# EAGLE board chaves (EAGLE 7.2.0)
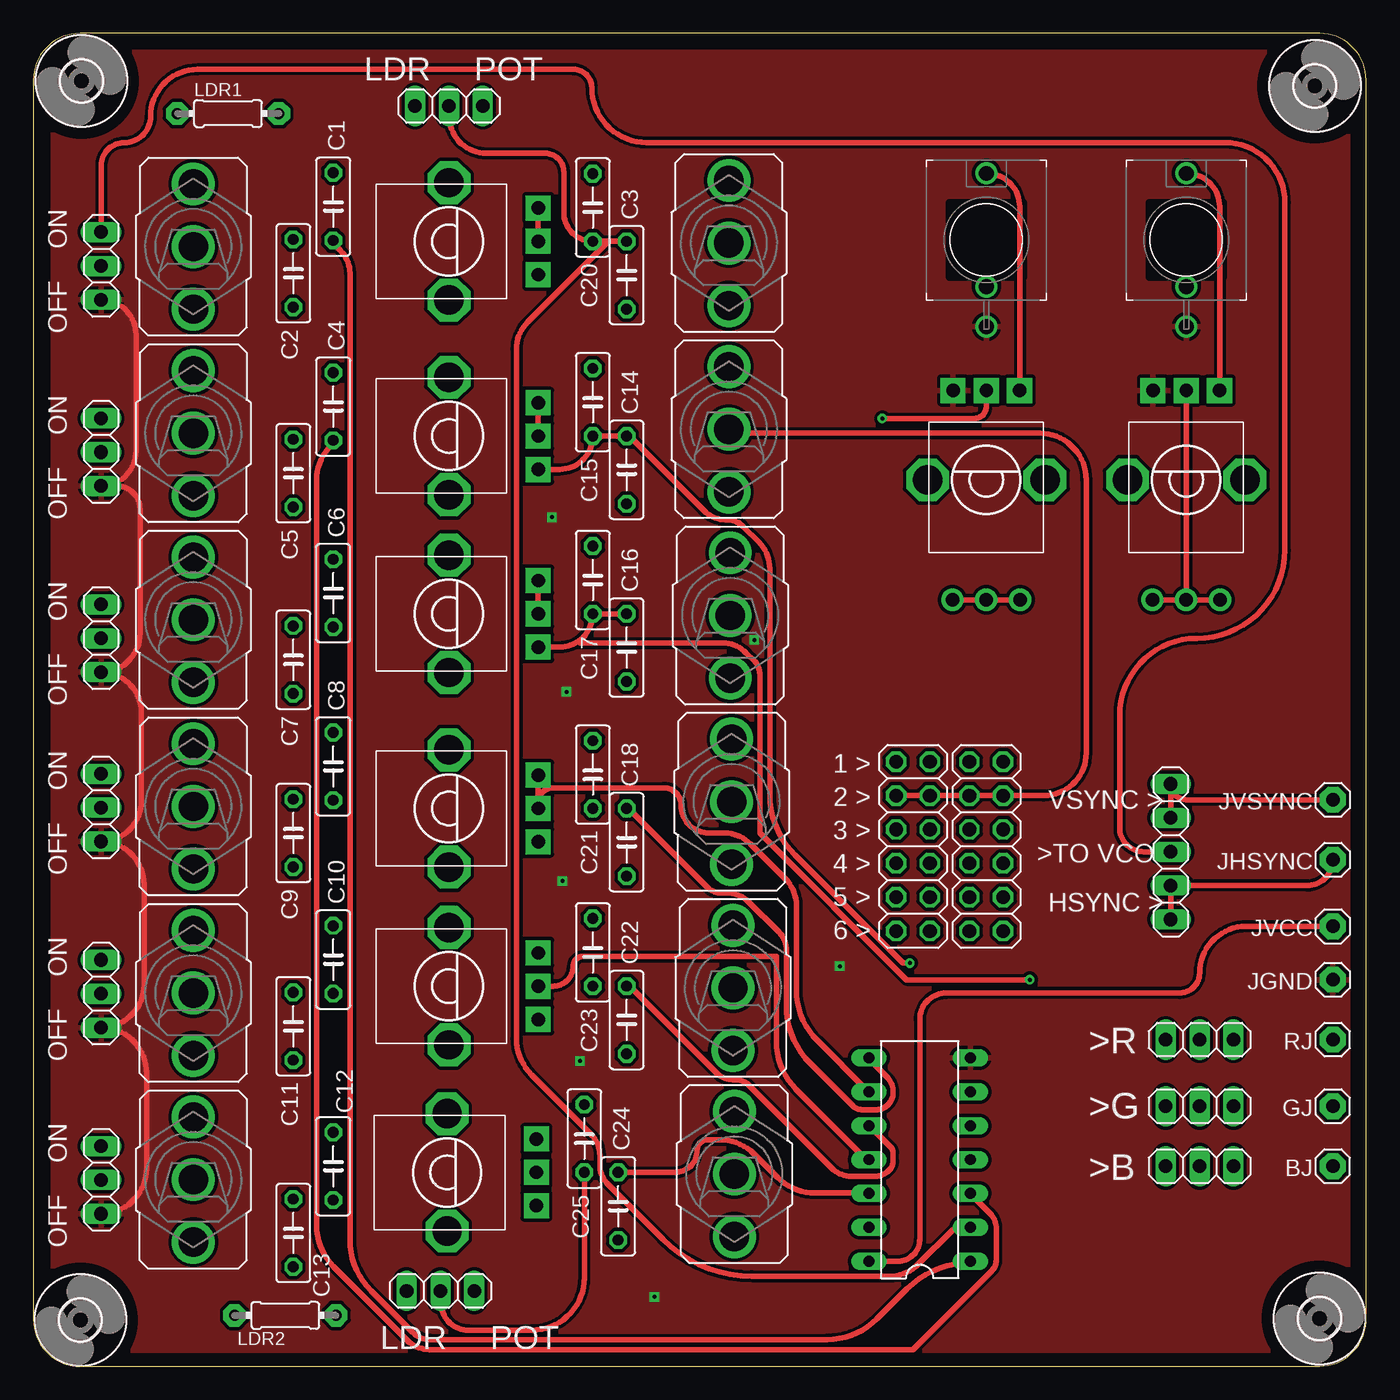
[diagram p0: board, top side]
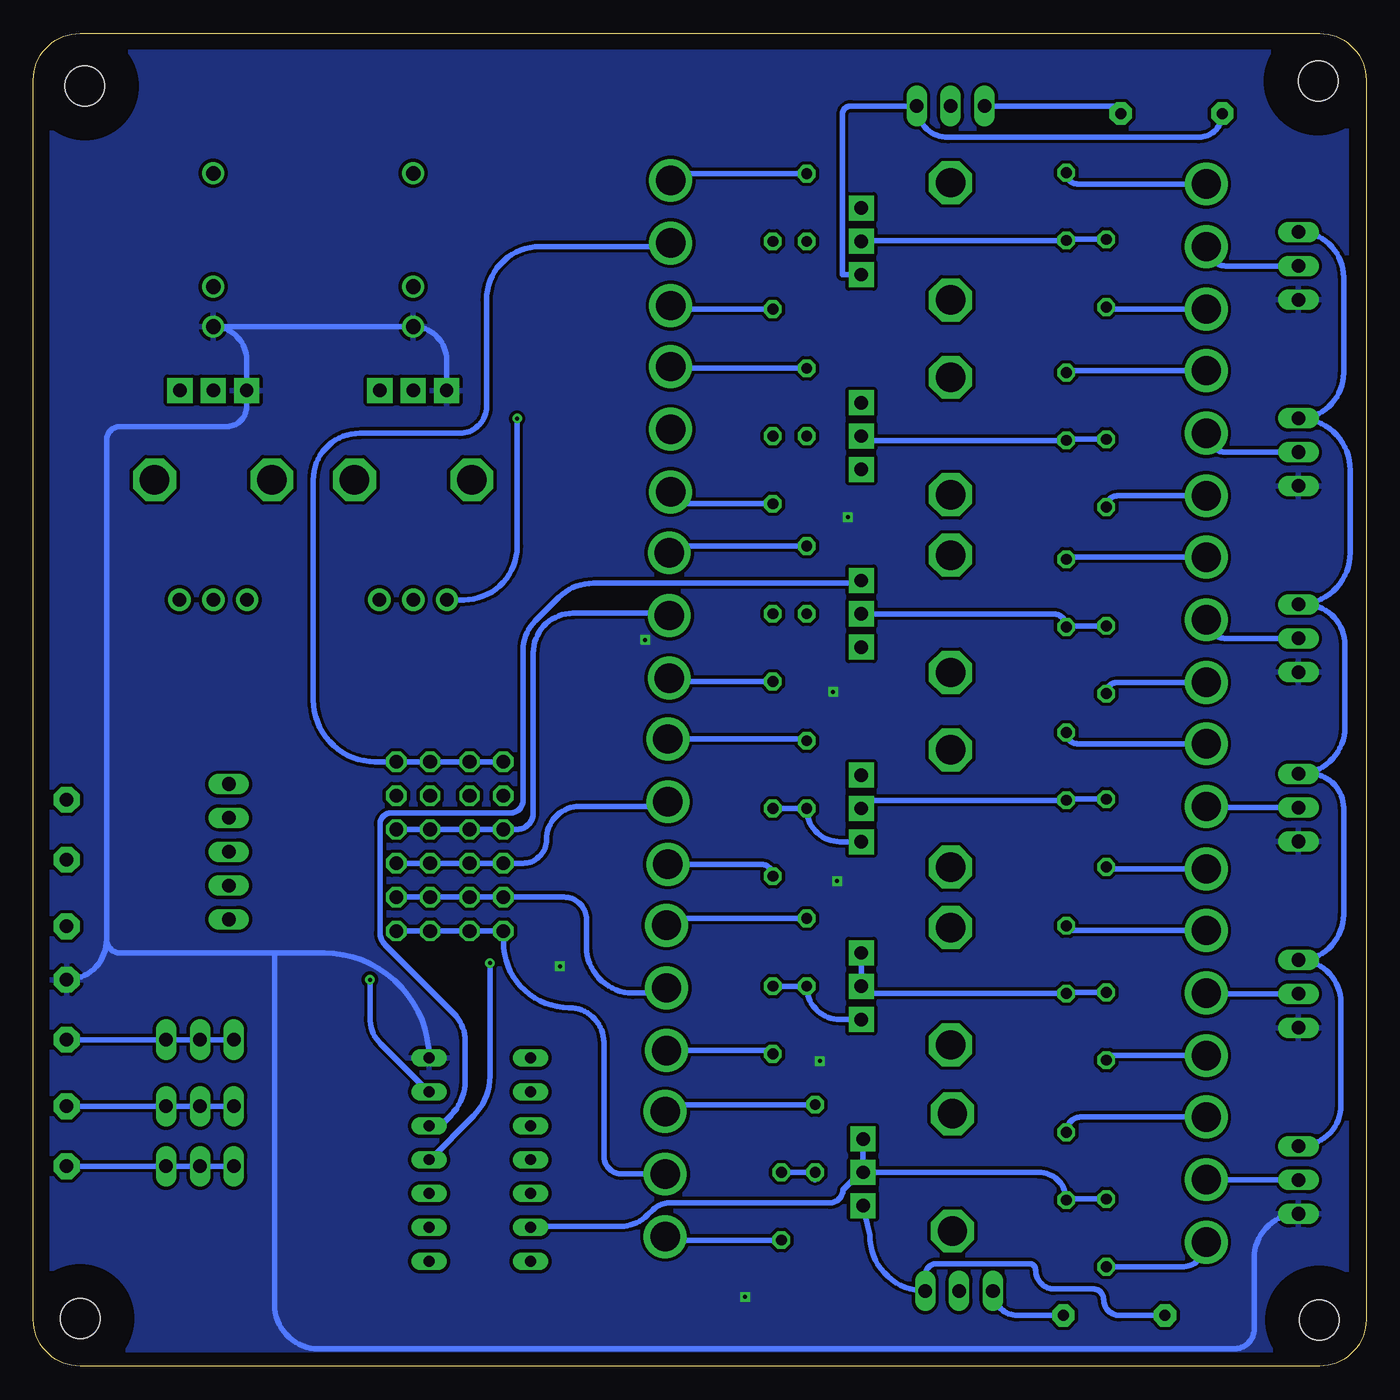
[diagram p1: board, bottom side, seen from below]

Size 100 x 100 mm. Coordinates in mm from the lower left corner, seen from the top.
Outline: 0,96.5 0,3.5 arc90 3.5,0 96.5,0 arc90 100,3.5 100,96.5 arc90 96.5,100 3.5,100 arc90 0,96.5
Copper layers (1*16): Top 0.035mm / dielectric 1.5mm / Bottom 0.035mm
Design rules "default *": minimum track width 10mil, minimum drill 24mil, track to track 8mil, track to pad 8mil, pad to pad 8mil, via to via 8mil, smd to smd 8mil, copper to edge 40mil, drill to drill 8mil, minimum pad ring 10mil, minimum via ring 8mil, stop-mask expansion 4mil, vias tented up to drill 0.3mm, thermal gap 10mil
Net classes: 0 default: width 0.406 mm, drill 0.254 mm, clearance 0.254 mm

## Footprints (pad centres in the part's own frame; a part is rotated, then mirrored left to right if it is on the bottom)
1X01 = drill 1.016 pad 1.93 octagon: 1 0,0
C050-025X075 = drill 0.813 octagon: 1 -2.54,0; 2 2.54,0
3,0 = hole 3: 0,0
DIL14 = drill 0.813 long: 1 -7.62,-3.81; 2 -5.08,-3.81; 3 -2.54,-3.81; 4 0,-3.81; 5 2.54,-3.81; 6 5.08,-3.81; 7 7.62,-3.81; 8 7.62,3.81; 9 5.08,3.81; 10 2.54,3.81; 11 0,3.81; 12 -2.54,3.81; 13 -5.08,3.81; 14 -7.62,3.81
WQP-PJ301M-12_JACK = drill 1.1: P$1_TIP 0,5; P$2_SWITCH 0,-3.5; P$3_SLEEVE 0,-6.5
2X06 = drill 1.016 octagon: 1 -6.35,-1.27; 2 -6.35,1.27; 3 -3.81,-1.27; 4 -3.81,1.27; 5 -1.27,-1.27; 6 -1.27,1.27; 7 1.27,-1.27; 8 1.27,1.27; 9 3.81,-1.27; 10 3.81,1.27; 11 6.35,-1.27; 12 6.35,1.27
1X05 = drill 1.016 long: 1 -5.08,0; 2 -2.54,0; 3 0,0; 4 2.54,0; 5 5.08,0
1X03 = drill 1.016 long: 1 -2.54,0; 2 0,0; 3 2.54,0
1X03-CLEANBIG = drill 1.016 pad 1.676: 1 -2.54,0; 2 0,0; 3 2.54,0
0204/7 = drill 0.813 pad 1.676 octagon: 1 -3.81,0; 2 3.81,0
ALPS_POT_VERTICAL = drill 1 pad 1.88 square: P$1 -2.5,6.7; P$2 0,6.7; P$3 2.5,6.7 | drill 2.2 pad 3.175 octagon: P$4 -4.4,0; P$5 4.4,0
M9040P = drill 2.2: 1 0,4.699 | drill 2.2 pad 3: 2 0,0; 3 0,-4.699

## Placement (x,y rotation side)
BJ  [1X01]  97.5,15 180 top
C1  101  [C050-025X075]  22.5,87 90 top
C2  102  [C050-025X075]  19.5,82 270 top
C3  103  [C050-025X075]  44.52,81.85 90 top
C4  101  [C050-025X075]  22.5,72 90 top
C5  102  [C050-025X075]  19.5,67 270 top
C6  103  [C050-025X075]  22.5,58 90 top
C7  104  [C050-025X075]  19.5,53 270 top
C8  103  [C050-025X075]  22.5,45 90 top
C9  104  [C050-025X075]  19.5,40 270 top
C10  101  [C050-025X075]  22.5,30.5 90 top
C11  104  [C050-025X075]  19.5,25.5 270 top
C12  101  [C050-025X075]  22.5,15 90 top
C13  104  [C050-025X075]  19.5,10 270 top
C14  103  [C050-025X075]  44.52,67.25 90 top
C15  104  [C050-025X075]  41.98,72.33 270 top
C16  103  [C050-025X075]  44.52,53.91 90 top
C17  104  [C050-025X075]  41.98,58.99 270 top
C18  103  [C050-025X075]  44.52,39.3 90 top
C20  104  [C050-025X075]  41.98,86.93 270 top
C21  104  [C050-025X075]  41.98,44.38 270 top
C22  103  [C050-025X075]  44.52,25.97 90 top
C23  104  [C050-025X075]  41.98,31.05 270 top
C24  103  [C050-025X075]  43.88,12 90 top
C25  104  [C050-025X075]  41.34,17.08 270 top
E$5  [3,0]  3.52,3.45 0 top
E$6  [3,0]  96.49,3.58 0 top
E$7  [3,0]  3.6,96.42 0 top
E$8  [3,0]  96.15,96.06 0 top
GJ  [1X01]  97.5,19.5 180 top
IC1  40106N  [DIL14]  66.5,15.5 90 top
IN1  WQP-PJ301M-12_JACK  [WQP-PJ301M-12_JACK]  86.5,84.5 0 top
IN2  WQP-PJ301M-12_JACK  [WQP-PJ301M-12_JACK]  71.5,84.5 0 top
JGND  [1X01]  97.5,29 90 top
JHSYNC  [1X01]  97.5,38 90 top
JP1  [2X06]  66,39 270 top
JP2  [2X06]  71.5,39 270 top
JP3  [1X05]  85.34,38.6 90 top
JP3_R  >R  [1X03]  87.5,24.5 0 top
JP4  >B  [1X03]  87.5,15 0 top
JP5  >G  [1X03]  87.5,19.5 0 top
JP6  [1X03-CLEANBIG]  86.5,57.5 0 top
JP7  [1X03-CLEANBIG]  71.5,57.5 0 top
JPSYNC_1  R  [1X03]  5.08,82.55 270 top
JPSYNC_2  R  [1X03]  5.08,68.58 270 top
JPSYNC_3  R  [1X03]  5.08,54.61 270 top
JPSYNC_4  R  [1X03]  5.08,41.91 270 top
JPSYNC_5  R  [1X03]  5.08,27.94 270 top
JPSYNC_6  R  [1X03]  5.08,13.97 270 top
JVCC  [1X01]  97.5,33 90 top
JVSYNC  [1X01]  97.5,42.5 90 top
LDR1  [0204/7]  14.61,93.98 0 top
LDR2  [0204/7]  18.91,3.81 0 top
LDR_SW1  [1X03]  31.18,94.55 0 top
LDR_SW2  [1X03]  30.55,5.65 0 top
POT1  10k  [ALPS_POT_VERTICAL]  31.18,84.39 270 top
POT2  10k  [ALPS_POT_VERTICAL]  31.18,69.78 270 top
POT3  10k  [ALPS_POT_VERTICAL]  31.18,56.45 270 top
POT4  10k  [ALPS_POT_VERTICAL]  31.18,41.84 270 top
POT5  10k  [ALPS_POT_VERTICAL]  31.18,28.51 270 top
POT6  10k  [ALPS_POT_VERTICAL]  31.05,14.54 270 top
POT7  10k  [ALPS_POT_VERTICAL]  86.5,66.5 0 top
POT8  10k  [ALPS_POT_VERTICAL]  71.5,66.5 0 top
RJ  [1X01]  97.5,24.5 180 top
U$1  T-80-T-SPDT-ON-OFF-ON  [M9040P]  52.19,84.26 0 top
U$2  T-80-T-SPDT-ON-OFF-ON  [M9040P]  52.19,70.29 0 top
U$3  T-80-T-SPDT-ON-OFF-ON  [M9040P]  52.29,56.32 0 top
U$4  T-80-T-SPDT-ON-OFF-ON  [M9040P]  52.39,42.35 0 top
U$5  T-80-T-SPDT-ON-OFF-ON  [M9040P]  52.49,28.38 0 top
U$6  T-80-T-SPDT-ON-OFF-ON  [M9040P]  52.59,14.41 0 top
U$7  T-80-T-SPDT-ON-OFF-ON  [M9040P]  12,84 0 top
U$8  T-80-T-SPDT-ON-OFF-ON  [M9040P]  12,70 0 top
U$9  T-80-T-SPDT-ON-OFF-ON  [M9040P]  12,56 0 top
U$10  T-80-T-SPDT-ON-OFF-ON  [M9040P]  12,42 0 top
U$11  T-80-T-SPDT-ON-OFF-ON  [M9040P]  12,28 0 top
U$12  T-80-T-SPDT-ON-OFF-ON  [M9040P]  12,14 0 top

## Library data of the parts
BJ C1-C18 C20-C25 GJ JGND JHSYNC JP6 JP7 JVCC JVSYNC LDR1 LDR2 RJ = adafruit
E$5-E$8 = holes
IC1 = 40xx
IN1 IN2 U$1-U$12 = MusicThingModular
JP1-JP3 JP3_R JP4 JP5 JPSYNC_1-JPSYNC_6 LDR_SW1 LDR_SW2 = pinhead
POT1-POT8 = pot-alps

## Nets
GND: IC1.7 IN1.P$3_SLEEVE IN2.P$3_SLEEVE JGND.1 JPSYNC_1.3 JPSYNC_2.3 JPSYNC_3.3 JPSYNC_4.3 JPSYNC_5.3 JPSYNC_6.3 POT7.P$1 POT8.P$1
GND1: C3.2 C20.2 IC1.2 LDR_SW1.2
GND2: C14.2 C15.2 IC1.4 POT2.P$3
GND3: C16.2 C17.2 IC1.6 POT3.P$3
GND4: C18.2 C21.2 IC1.8 POT4.P$3
GND5: C22.2 C23.2 IC1.10 POT5.P$3
GND6: C24.2 C25.2 IC1.12 LDR_SW2.2
N$1: C1.2 U$7.1
N$2: C2.2 U$7.3
N$3: LDR2.2 LDR_SW2.1
N$4: C5.2 U$8.3
N$5: C4.2 U$8.1
N$6: LDR1.2 LDR_SW1.1
N$7: C8.2 U$10.1
N$8: C9.2 U$10.3
N$9: IN2.P$1_TIP POT8.P$3
N$10: C6.2 U$9.1
N$11: C7.2 U$9.3
N$12: JP6.1 JP6.2 JP6.3 POT7.P$2
N$13: BJ.1 JP4.1 JP4.2 JP4.3
N$14: GJ.1 JP5.1 JP5.2 JP5.3
N$15: JP3_R.1 JP3_R.2 JP3_R.3 RJ.1
N$16: C20.1 U$1.1
N$17: C3.1 U$1.3
N$18: JP1.1 JP1.2 JP2.1 JP2.2 U$1.2
N$19: LDR1.1 LDR_SW1.3 POT1.P$3
N$20: JHSYNC.1 JP3.1 JP3.2
N$21: JP3.4 JP3.5 JVSYNC.1
N$22: LDR2.1 LDR_SW2.3 POT6.P$3
N$23: IN1.P$1_TIP POT7.P$3
N$24: C15.1 U$2.1
N$25: JP7.1 JP7.2 JP7.3 POT8.P$2
N$26: C14.1 U$2.3
N$27: JP1.3 JP1.4 JP2.3 JP2.4 U$2.2
N$28: C17.1 U$3.1
N$29: C16.1 U$3.3
N$30: JP1.5 JP1.6 JP2.5 JP2.6 U$3.2
N$31: C1.1 C2.1 IC1.1 POT1.P$1 POT1.P$2
N$32: C4.1 C5.1 IC1.3 POT2.P$1 POT2.P$2
N$33: C6.1 C7.1 IC1.5 POT3.P$1 POT3.P$2
N$34: C8.1 C9.1 IC1.9 POT4.P$1 POT4.P$2
N$37: C21.1 U$4.1
N$38: C18.1 U$4.3
N$39: JP1.7 JP1.8 JP2.7 JP2.8 U$4.2
N$40: C23.1 U$5.1
N$41: C22.1 U$5.3
N$42: JP1.9 JP1.10 JP2.9 JP2.10 U$5.2
N$43: C25.1 U$6.1
N$44: C24.1 U$6.3
N$45: JP1.11 JP1.12 JP2.11 JP2.12 U$6.2
N$46: C10.2 U$11.1
N$47: C10.1 C11.1 IC1.11 POT5.P$1 POT5.P$2
N$48: C11.2 U$11.3
N$49: C13.2 U$12.3
N$50: C12.2 U$12.1
N$51: C12.1 C13.1 IC1.13 POT6.P$1 POT6.P$2
SS1: JPSYNC_1.2 U$7.2
SS2: JPSYNC_2.2 U$8.2
SS3: JPSYNC_3.2 U$9.2
SS4: JPSYNC_4.2 U$10.2
SS5: JPSYNC_5.2 U$11.2
SS6: JPSYNC_6.2 U$12.2
VCC: IC1.14 JVCC.1
VCOSYNC: JP3.3 JPSYNC_1.1 JPSYNC_2.1 JPSYNC_3.1 JPSYNC_4.1 JPSYNC_5.1 JPSYNC_6.1

## Tracks (layer width: path | path; a pad name or v marks a point on that pad's centre or on a via)
GND  (via drill 0.3)
  Top 0.406: JPSYNC_6.3 arc90 8.5,14.85 8.5,21.98 arc90 JPSYNC_5.3 arc90 8.3,28.62 8.3,36.15 arc90 JPSYNC_4.3 arc90 8.1,42.39 8.1,49.05 arc90 JPSYNC_3.3 arc90 8,54.99 8,64.3 arc90 6.26,66.04 JPSYNC_2.3 arc90 7.7,68.66 7.7,77.39 arc90 JPSYNC_1.3
  Bottom 0.406: JPSYNC_6.3 arc-90 8.4,8.11 8.4,2.8 arc90 9.9,1.3 78.6,1.3 arc90 81.9,4.6 81.9,31 | POT8.P$1 69,75.5 arc-90 IN2.P$3_SLEEVE IN1.P$3_SLEEVE arc90 84,75.5 POT7.P$1 84,72 arc90 85.5,70.5 93.5,70.5 arc-90 94.5,69.5 94.5,32 | JGND.1 arc-90 94.5,32 | IC1.7 arc-90 78.19,31 81.9,31 | 81.9,31 93.5,31 arc90 94.5,32
  other vias: 46.6,5.2 41,22.9 39.7,36.4 38.9,63.7 40,50.6 54.1,54.5 60.5,30
  pour Bottom: 1.6,98.6 98.6,98.6 98.6,0.6 1.5,0.6 1.5,98.6
  pour Top (isolate 0.254): 1.5,98.6 98.6,98.6 98.6,0.6 1.5,0.6
GND1
  Top 0.406: LDR_SW1.2 31.18,93.82 arc90 34,91 38.4,91 arc-90 39.8,89.6 39.8,86.56 arc90 C20.2 43,84.39 | 43,84.39 C3.2 | IC1.2 70.25,10.25 69,10.25 66.42,7.67 arc-45 64.2,6.75 53.91,6.75 arc-45 47.23,9.52 43.12,13.63 arc-45 42.5,15.13 42.5,15.82 arc45 41.84,17.41 37.38,21.88 arc-45 36.25,24.59 36.25,76.31 arc-45 37.09,78.34 43,84.25 43,84.39
GND2  (via drill 0.3)
  Top 0.406: POT2.P$3 39.48,67.28 arc90 C15.2 C14.2 44.75,69.75 50.31,64.19 arc45 51.98,63.5 52.05,63.5 arc-45 53.24,63.01 54.43,61.82 arc-45 55.25,59.84 55.25,42.91 arc45 57.13,38.37 65.25,30.25 v65.75,30.25
  Bottom 0.406: v65.75,30.25 65.75,21.73 arc45 66.97,18.78 70.25,15.5 IC1.4
GND3  (via drill 0.3)
  Top 0.406: POT3.P$3 39.48,53.95 arc35 40.9,54.4 | 40.9,54.4 arc55 C17.2 C16.2 | v74.75,29 65.5,29 54.5,40 54.5,51.97 arc45 54.13,52.87 53.48,53.52 arc45 51.72,54.25 41,54.25 40.9,54.4
  Bottom 0.406: v74.75,29 74.75,26.15 arc-45 73.94,24.19 70.5,20.75 IC1.6
GND4
  Top 0.406: IC1.8 62.75,23 64.02,21.73 arc-45 64.5,20.57 64.5,20.45 arc-45 64.19,19.68 64.05,19.55 arc-45 63.33,19.25 62.13,19.25 arc-45 61.48,19.52 58.29,22.71 arc-45 56.5,27.03 56.5,31.2 arc45 55.94,32.56 53.67,34.83 arc45 52.05,35.5 51.66,35.5 arc-45 50.54,35.96 44.75,41.75 C18.2
  Bottom 0.406: POT4.P$3 39.48,39.34 arc90 C21.2 C18.2
GND5
  Top 0.406: IC1.10 62.75,18 64.34,16.41 arc-45 64.5,16.03 64.5,15.38 arc-45 64.23,14.73 64.16,14.66 arc-45 63.17,14.25 61.37,14.25 arc-45 59.88,14.87 53.62,21.13 arc45 52.73,21.5 52.5,21.5 arc-45 51.22,22.03 44.75,28.5 C22.2
  Bottom 0.406: POT5.P$3 39.48,26.01 arc90 C23.2 C22.2
GND6
  Top 0.406: LDR_SW2.2 arc-90 30.6,5.59 30.6,4.75 arc90 32.65,2.7 37.4,2.7 arc90 41.34,6.64 C25.2 | C24.2 48.14,14.54 arc90 49.8,16.2 arc-90 50.6,17 51.48,17 arc-45 54.08,15.93 55.82,14.18 arc45 58.67,13 62.5,13 IC1.12
  Bottom 0.406: C24.2 41.88,14.54 | 41.88,14.54 arc90 41.34,14 | C25.2 41.88,14.54
N$1
  Bottom 0.406: U$7.1 21.66,88.7 arc90 C1.2
N$2
  Bottom 0.406: U$7.3 19.34,79.3 arc90 C2.2
N$3
  Bottom 0.406: LDR2.2 26.16,3.81 arc90 LDR_SW2.1
N$4
  Bottom 0.406: U$8.3 18.66,65.3 arc-90 C5.2
N$5
  Bottom 0.406: U$8.1 22.34,74.7 arc-90 C4.2
N$6
  Bottom 0.406: LDR1.2 arc-90 18.98,94.55 LDR_SW1.1
N$7
  Bottom 0.406: U$10.1 21.66,46.7 arc90 C8.2
N$8
  Bottom 0.406: U$10.3 19.34,37.3 arc90 C9.2
N$9
  Top 0.406: IN2.P$1_TIP arc-90 74,87 POT8.P$3
N$10
  Bottom 0.406: U$9.1 22.34,60.7 arc-90 C6.2
N$11
  Bottom 0.406: U$9.3 18.66,51.3 arc-90 C7.2
N$12
  Top 0.406: POT7.P$2 JP6.2 | JP6.3 JP6.2 | JP6.2 JP6.1
N$13
  Bottom 0.406: JP4.1 JP4.2 JP4.3 BJ.1
N$14
  Bottom 0.406: JP5.1 JP5.2 JP5.3 GJ.1
N$15
  Bottom 0.406: JP3_R.1 JP3_R.2 JP3_R.3 RJ.1
N$16
  Bottom 0.406: C20.1 51.68,89.47 arc-90 U$1.1
N$17
  Bottom 0.406: C3.1 51.93,79.31 arc90 U$1.3
N$18
  Bottom 0.406: U$1.2 arc90 52.45,84 62,84 arc-90 66,80 66,72 arc90 68,70 75.5,70 arc-90 79,66.5 79,50 arc-90 74.35,45.35 JP2.2 JP2.1 JP1.2 JP1.1
N$19
  Bottom 0.406: LDR1.1 arc90 12.57,92.2 31.37,92.2 arc90 LDR_SW1.3 38.65,94.55 arc-90 39.3,93.9 39.3,81.89 POT1.P$3
N$20
  Top 0.406: JP3.1 JP3.2 95.56,36.06 arc90 JHSYNC.1
N$21
  Top 0.406: JVSYNC.1 86.52,42.5 arc-90 JP3.5 JP3.4
N$22
  Bottom 0.406: POT6.P$3 37.24,9.81 arc-90 LDR_SW2.3 33.09,6.82 arc90 32.2,7.7 25.3,7.7 arc90 24.8,7.2 arc-90 23.4,5.8 20.5,5.8 arc90 19.7,5 arc-90 18.51,3.81 LDR2.1
N$23
  Top 0.406: IN1.P$1_TIP arc-90 89,87 POT7.P$3
N$24
  Bottom 0.406: C15.1 52.06,74.86 arc90 U$2.1
N$25  (via drill 0.3)
  Top 0.406: JP7.3 JP7.2 JP7.1 | v63.7,71.1 70.6,71.1 arc90 71.5,72 POT8.P$2
  Bottom 0.406: v63.7,71.1 63.7,61.5 arc90 67.7,57.5 JP7.1
N$26
  Bottom 0.406: C14.1 51.3,64.7 arc90 U$2.3
N$27
  Top 0.406: U$2.2 arc90 52.48,70 75.5,70 arc-90 79,66.5 79,46 arc-90 75.81,42.81 JP2.4 JP2.3 JP1.4 JP1.3
N$28
  Bottom 0.406: C17.1 51.78,61.53 arc-90 U$3.1
N$29
  Bottom 0.406: C16.1 52.03,51.37 arc90 U$3.3
N$30
  Bottom 0.406: U$3.2 arc-90 52.46,56.5 59.5,56.5 arc-90 62.5,53.5 62.5,41.5 arc90 63.73,40.27 JP1.5 JP1.6 JP2.5 JP2.6
N$31
  Top 0.406: POT1.P$2 POT1.P$1 | IC1.1 70.25,7.75 arc45 65.56,5.8 63.31,3.56 arc-45 59.55,2 29.75,2 arc-45 28.47,2.53 25.34,5.66 arc-45 23.75,9.49 23.75,81.99 arc45 23.04,83.72 22.5,84.25 C1.1
  Bottom 0.406: C2.1 22.42,84.54 arc-90 C1.1 37.81,84.46 arc-90 POT1.P$2
N$32
  Top 0.406: POT2.P$2 POT2.P$1 | IC1.3 70.5,12.75 71.78,11.47 arc-45 72.25,10.33 72.25,7.99 arc-45 71.9,7.15 66,1.25 29.73,1.25 arc-45 28.05,1.95 22.51,7.49 arc-45 21.25,10.53 21.25,66.46 arc-45 22.34,69.09 22.5,69.25 C4.1
  Bottom 0.406: C5.1 22.42,69.54 arc-90 C4.1 37.55,69.46 arc90 POT2.P$2
N$33
  Top 0.406: POT3.P$2 POT3.P$1
  Bottom 0.406: C7.1 22.42,55.54 arc-90 C6.1 arc-90 23.49,56.45 POT3.P$2 | 70.25,18.25 IC1.5 69.46,18.04 68.67,18.83 arc-45 67.6,21.41 67.6,24.4 arc-45 68.45,26.45 73.62,31.62 arc45 74,32.54 74,40.61 arc45 73.72,41.28 arc45 73.19,41.5 64.22,41.5 arc-90 63.25,42.47 63.25,53.69 arc45 62.32,55.93 60.58,57.67 arc45 57.98,58.75 38,58.75 POT3.P$1
N$34
  Top 0.406: 37.82,41.78 arc90 POT4.P$2 | POT4.P$2 POT4.P$1 | POT4.P$2 37.88,42.28 arc-90 39,43.4 47.3,43.4 arc-90 48.6,42.1 arc90 50.7,40 51.85,40 arc-45 53.81,39.19 56.4,36.6 arc-45 57.25,34.54 57.25,28.22 arc45 58.82,24.43 62.5,20.75 IC1.9
  Bottom 0.406: C9.1 22.42,42.54 arc-90 C8.1 37.27,42.46 arc-90 POT4.P$2
N$37
  Bottom 0.406: C21.1 arc-90 42.1,47.05 U$4.1
N$38
  Bottom 0.406: C18.1 arc-90 45.4,37.65 U$4.3
N$39
  Bottom 0.406: U$4.2 arc90 52.74,42 59,42 arc-90 61.5,39.5 arc90 63.27,37.73 JP1.7 JP1.8 JP2.7 JP2.8
N$40
  Bottom 0.406: C23.1 51.98,33.59 arc-90 U$5.1
N$41
  Bottom 0.406: C22.1 arc-90 44.77,23.68 U$5.3
N$42
  Bottom 0.406: U$5.2 arc90 52.87,28 55.02,28 arc90 58.5,31.48 58.5,33.5 arc-90 60.19,35.19 JP1.9 JP1.10 JP2.9 JP2.10
N$43
  Bottom 0.406: C25.1 52.08,19.62 arc-90 U$6.1
N$44
  Bottom 0.406: C24.1 52.34,9.46 arc90 U$6.3
N$45
  Bottom 0.406: JP2.12 JP2.11 JP1.12 JP1.11 64.73,31.83 arc-90 59.8,26.9 arc90 57.2,24.3 57.2,15.8 arc-90 55.81,14.41 U$6.2
N$46
  Bottom 0.406: U$11.1 22.16,32.7 arc90 C10.2
N$47
  Top 0.406: POT5.P$2 39.01,28.51 arc90 40.5,30 arc-90 41.25,30.75 55.75,30.75 55.75,24.35 arc45 57.24,20.76 62.5,15.5 IC1.11
  Bottom 0.406: C11.1 22.42,28.04 arc-90 C10.1 37.33,27.96 arc90 POT5.P$2 POT5.P$1
N$48
  Bottom 0.406: U$11.3 19.16,23.3 arc-90 C11.2
N$49
  Bottom 0.406: U$12.3 arc90 13.84,7.46 C13.2
N$50
  Bottom 0.406: U$12.1 21.34,18.7 arc-90 C12.2
N$51
  Bottom 0.406: C13.1 22.42,12.54 arc-90 C12.1 arc-90 24.58,14.54 POT6.P$2 | POT6.P$2 POT6.P$1 | IC1.13 62.5,10.5 55.94,10.5 arc-45 53.91,11.34 53.51,11.74 arc45 52.28,12.25 40.25,12.25 arc-90 39.25,13.25 37.75,14.75 POT6.P$2
SS1
  Bottom 0.406: JPSYNC_1.2 10.55,82.55 arc90 U$7.2
SS2
  Bottom 0.406: JPSYNC_2.2 10.58,68.58 arc90 U$8.2
SS3
  Bottom 0.406: JPSYNC_3.2 10.61,54.61 arc90 U$9.2
SS4
  Bottom 0.406: JPSYNC_4.2 11.91,41.91 arc90 U$10.2
SS5
  Bottom 0.406: JPSYNC_5.2 11.94,27.94 arc90 U$11.2
SS6
  Bottom 0.406: JPSYNC_6.2 12,13.97 U$12.2
VCC
  Top 0.406: JVCC.1 91,33 arc90 87.5,29.5 arc-90 86,28 68.5,28 arc90 66.5,26 66.5,9.5 arc-90 64.88,7.88 IC1.14
VCOSYNC
  Top 0.406: JP3.3 83.3,38.6 arc-90 81.5,40.4 81.5,48.82 arc-90 87.28,54.6 arc90 93.9,61.22 93.9,87.31 arc90 89.41,91.8 46.02,91.8 arc-90 41.9,95.92 arc90 40.52,97.3 12.32,97.3 arc90 8.8,93.78 arc-90 6.82,91.8 arc90 5.1,90.08 5.1,85.11 arc-90 JPSYNC_1.1
  Bottom 0.406: JPSYNC_6.1 4.99,16.51 arc-90 1.9,19.6 1.9,27.3 arc-90 JPSYNC_5.1 arc-90 1.7,33.86 1.7,41.9 arc-90 4.25,44.45 JPSYNC_4.1 arc-90 1.6,47.93 1.6,54.1 arc-90 4.65,57.15 JPSYNC_3.1 arc-90 1.2,61.03 1.2,67.24 arc-90 JPSYNC_2.1 arc-90 1.7,74.5 1.7,81.71 arc-90 JPSYNC_1.1

## Text on the board
tNames: LDR | POT | ON | OFF | ON | OFF | ON | OFF | 1 > | ON | 2 > | VSYNC > | 3 > | >TO VCO | OFF | 4 > | 5 > | HSYNC > | 6 > | ON | OFF | ON | OFF | LDR | POT
tValues: CHA/VES - based on jonasbers.com/chav/